# EAGLE board MRCS-IOX32 (EAGLE 7.3.0)
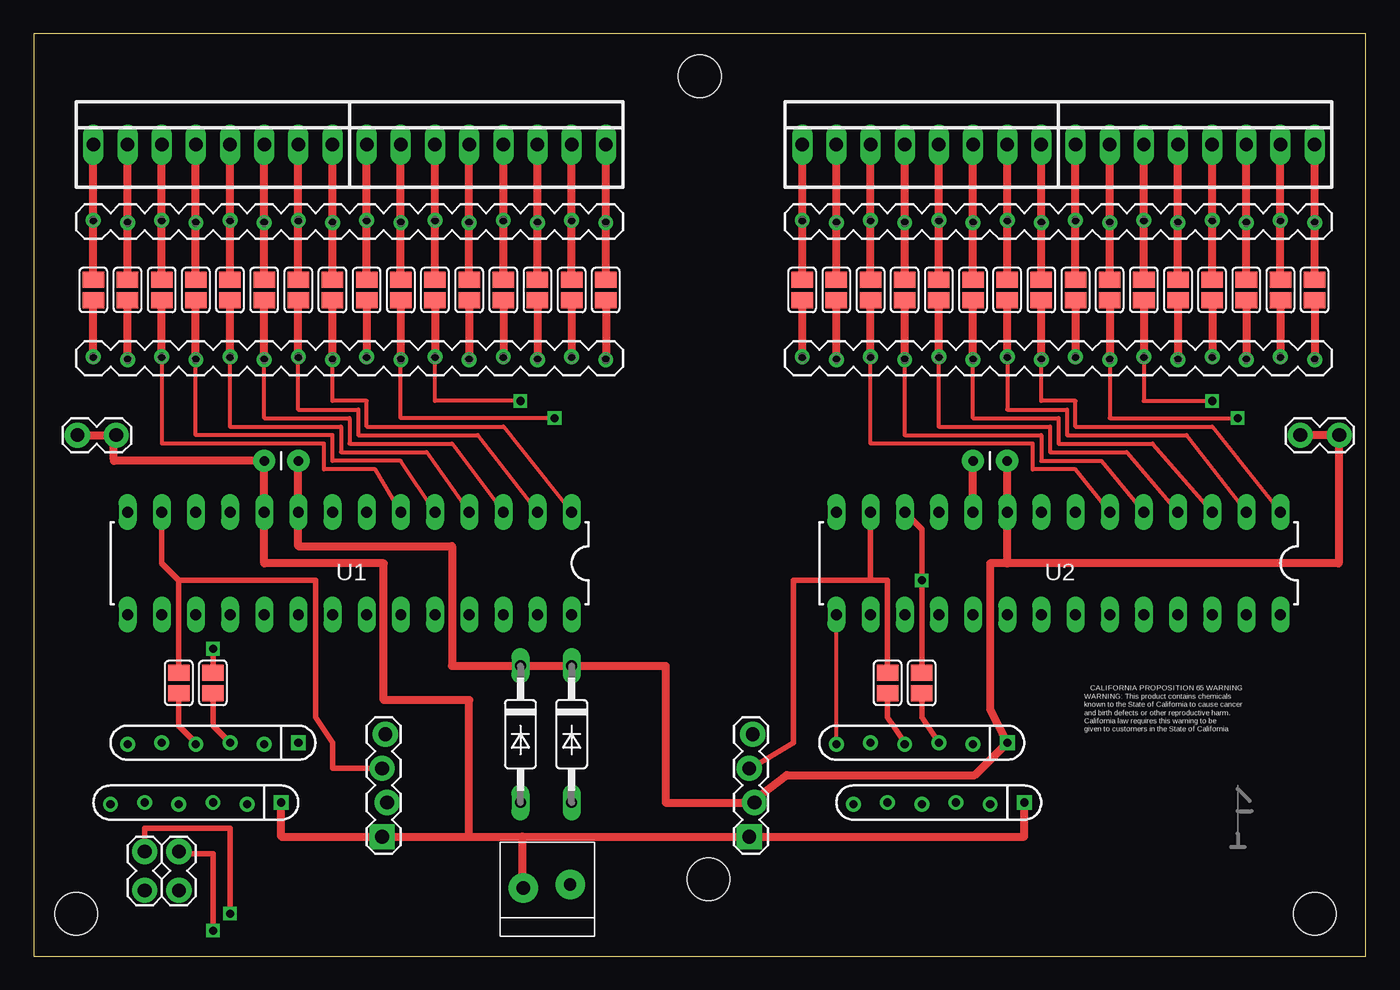
[diagram p0: board, top side]
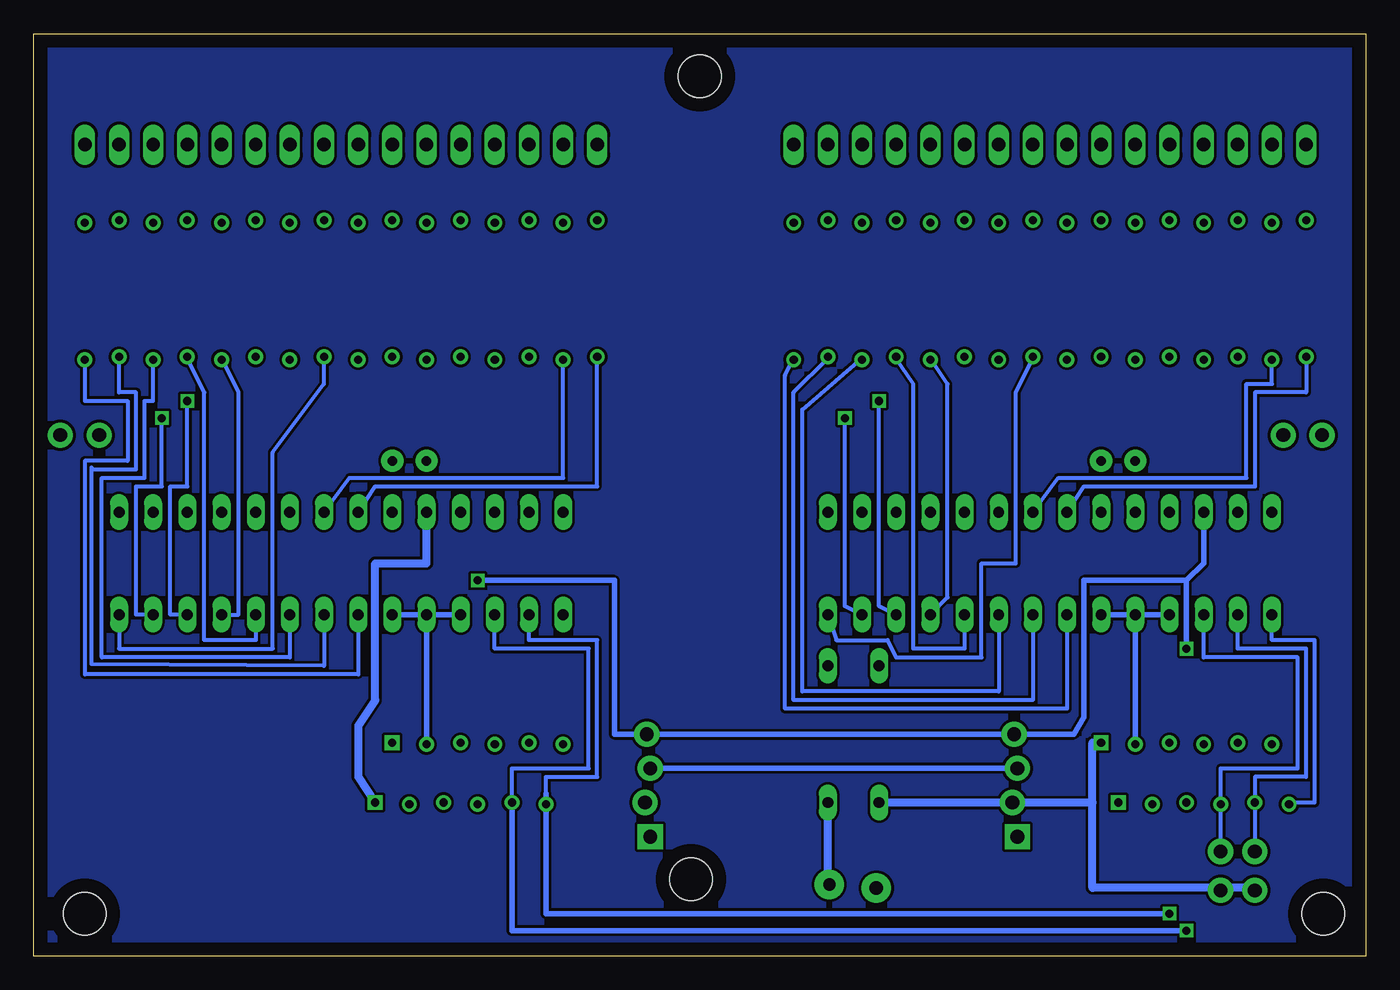
[diagram p1: board, bottom side, seen from below]

Size 99.06 x 68.58 mm. Coordinates in mm from the lower left corner, seen from the top.
Outline: 99.06,0 99.06,68.58 0,68.58 0,0 99.06,0
Copper layers (1*16): Top 0.035mm / dielectric 1.5mm / Bottom 0.035mm
Design rules "default": minimum track width 10mil, minimum drill 24mil, track to track 8mil, track to pad 8mil, pad to pad 8mil, via to via 8mil, smd to smd 8mil, copper to edge 40mil, drill to drill 8mil, minimum pad ring 10mil, minimum via ring 8mil, stop-mask expansion 4mil, vias tented up to drill 0mil, thermal gap 10mil

## Footprints (pad centres in the part's own frame; a part is rotated, then mirrored left to right if it is on the bottom)
1X02_LOCK = drill 1.016 pad 1.88: 1 -0.178,0; 2 2.718,0
CAP-PTH-SMALL = drill 0.7 pad 1.651: 1 0,0; 2 2.54,0
C2992 = drill 0.813 long: A 5.08,0; C -5.08,0
DRILL_0.1250 = hole 3.175: 0,0
1X04_LOCK = drill 1.016 pad 1.88 square: 1 0,0.127 | drill 1.016 pad 1.88: 2 2.54,-0.254; 3 5.08,0.127; 4 7.62,-0.127
1X16_MACHINE-PIN-HEADER_LOCK.004 = drill 0.6: 1 0,0.102; 2 2.54,-0.102; 3 5.08,0.102; 4 7.62,-0.102; 5 10.16,0.102; 6 12.7,-0.102; 7 15.24,0.102; 8 17.78,-0.102; 9 20.32,0.102; 10 22.86,-0.102; 11 25.4,0.102; 12 27.94,-0.102; 13 30.48,0.102; 14 33.02,-0.102; 15 35.56,0.102; 16 38.1,-0.102
3.5MMTERM = drill 0.9 pad 2.184: 1 1.8,0.254 | drill 1 pad 2.184: 2 -1.7,0
2P-SMD-2X3.3 = smd 1.168 x 1.6: 1 -0.762,0; 2 0.762,0
22-23-2081 = drill 1 long: 1 -8.89,0; 2 -6.35,0; 3 -3.81,0; 4 -1.27,0; 5 1.27,0; 6 3.81,0; 7 6.35,0; 8 8.89,0
RPACK-SIP-PTH-5 = drill 0.6 square: P$1 0,0 | drill 0.6: P$2 0.127,-2.54; P$3 0,-5.08; P$4 0.127,-7.62; P$5 0,-10.16; P$6 0.127,-12.7
DIL28-3 = drill 0.813 long: 1 -16.51,-3.81; 2 -13.97,-3.81; 3 -11.43,-3.81; 4 -8.89,-3.81; 5 -6.35,-3.81; 6 -3.81,-3.81; 7 -1.27,-3.81; 8 1.27,-3.81; 9 3.81,-3.81; 10 6.35,-3.81; 11 8.89,-3.81; 12 11.43,-3.81; 13 13.97,-3.81; 14 16.51,-3.81; 15 16.51,3.81; 16 13.97,3.81; 17 11.43,3.81; 18 8.89,3.81; 19 6.35,3.81; 20 3.81,3.81; 21 1.27,3.81; 22 -1.27,3.81; 23 -3.81,3.81; 24 -6.35,3.81; 25 -8.89,3.81; 26 -11.43,3.81; 27 -13.97,3.81; 28 -16.51,3.81

## Placement (x,y rotation side)
5V  [1X02_LOCK]  96.9,38.73 180 top
ADDR1  [1X02_LOCK]  8.26,5.08 90 top
ADDR2  [1X02_LOCK]  10.79,5.08 90 top
C1  .01uf  [CAP-PTH-SMALL]  19.68,36.83 180 top
C2  .01uf  [CAP-PTH-SMALL]  72.39,36.83 180 top
COM  [1X02_LOCK]  5.97,38.73 180 top
D1  D1  [C2992]  36.2,16.51 270 top
D2  D2  [C2992]  40.01,16.51 270 top
E$1  [DRILL_0.1250]  3.17,3.17 0 top
E$6  [DRILL_0.1250]  50.16,5.71 0 top
E$7  [DRILL_0.1250]  95.25,3.17 270 top
E$8  [DRILL_0.1250]  49.53,65.41 0 top
E$9  [MRCSLOGOTOP]  88.27,7.62 0 top
E$10  [1X04_LOCK]  26.04,8.89 90 top
E$12  [1X16_MACHINE-PIN-HEADER_LOCK.004]  57.15,54.61 0 top
E$13  [1X16_MACHINE-PIN-HEADER_LOCK.004]  4.45,44.45 0 top
E$14  [CA-PROP65WARNING]  84.45,18.41 0 top
E$15  [1X16_MACHINE-PIN-HEADER_LOCK.004]  57.15,44.45 0 top
E$19  [1X04_LOCK]  53.34,8.89 90 top
E$25  [1X16_MACHINE-PIN-HEADER_LOCK.004]  4.45,54.61 0 top
EXT5V  [3.5MMTERM]  38.1,5.08 0 top
I2CT1  [2P-SMD-2X3.3]  13.34,20.32 90 top
I2CT2  [2P-SMD-2X3.3]  10.79,20.32 90 top
I2CT3  [2P-SMD-2X3.3]  63.5,20.32 90 top
I2CT4  [2P-SMD-2X3.3]  66.04,20.32 90 top
PORTA  [22-23-2081]  13.34,60.33 0 top
PORTA1  [22-23-2081]  66.04,60.33 0 top
PORTB  [22-23-2081]  33.66,60.33 0 top
PORTB1  [22-23-2081]  86.36,60.33 0 top
RP1  [RPACK-SIP-PTH-5]  19.68,15.88 270 top
RP2  [RPACK-SIP-PTH-5]  18.41,11.43 270 top
RP3  [RPACK-SIP-PTH-5]  72.39,15.88 270 top
RP4  [RPACK-SIP-PTH-5]  73.66,11.43 270 top
SJ1  [2P-SMD-2X3.3]  22.23,49.53 90 top
SJ2  [2P-SMD-2X3.3]  19.68,49.53 90 top
SJ3  [2P-SMD-2X3.3]  17.14,49.53 90 top
SJ4  [2P-SMD-2X3.3]  14.61,49.53 90 top
SJ5  [2P-SMD-2X3.3]  12.06,49.53 90 top
SJ6  [2P-SMD-2X3.3]  9.53,49.53 90 top
SJ7  [2P-SMD-2X3.3]  6.99,49.53 90 top
SJ8  [2P-SMD-2X3.3]  4.45,49.53 90 top
SJ9  [2P-SMD-2X3.3]  42.55,49.53 90 top
SJ10  [2P-SMD-2X3.3]  40.01,49.53 90 top
SJ11  [2P-SMD-2X3.3]  37.47,49.53 90 top
SJ12  [2P-SMD-2X3.3]  34.92,49.53 90 top
SJ13  [2P-SMD-2X3.3]  32.38,49.53 90 top
SJ14  [2P-SMD-2X3.3]  29.84,49.53 90 top
SJ15  [2P-SMD-2X3.3]  27.3,49.53 90 top
SJ16  [2P-SMD-2X3.3]  24.77,49.53 90 top
SJ17  [2P-SMD-2X3.3]  57.15,49.53 90 top
SJ18  [2P-SMD-2X3.3]  72.39,49.53 90 top
SJ19  [2P-SMD-2X3.3]  69.85,49.53 90 top
SJ20  [2P-SMD-2X3.3]  67.31,49.53 90 top
SJ21  [2P-SMD-2X3.3]  64.77,49.53 90 top
SJ22  [2P-SMD-2X3.3]  62.23,49.53 90 top
SJ23  [2P-SMD-2X3.3]  59.69,49.53 90 top
SJ24  [2P-SMD-2X3.3]  74.93,49.53 90 top
SJ25  [2P-SMD-2X3.3]  95.25,49.53 90 top
SJ26  [2P-SMD-2X3.3]  92.71,49.53 90 top
SJ27  [2P-SMD-2X3.3]  90.17,49.53 90 top
SJ28  [2P-SMD-2X3.3]  87.63,49.53 90 top
SJ29  [2P-SMD-2X3.3]  85.09,49.53 90 top
SJ30  [2P-SMD-2X3.3]  82.55,49.53 90 top
SJ31  [2P-SMD-2X3.3]  80.01,49.53 90 top
SJ32  [2P-SMD-2X3.3]  77.47,49.53 90 top
U1  MCP23017  [DIL28-3]  23.5,29.21 180 top
U2  MCP23017  [DIL28-3]  76.2,29.21 180 top

## Library data of the parts
5V ADDR1 ADDR2 COM E$10 E$12 E$13 E$15 E$19 E$25 = SparkFun-Connectors
C1 C2 U1 U2 = SparkFun
D1 D2 = diode
E$1 E$6-E$8 = special-drill
E$9 = MRCSLogoTop
E$14 = MRCS-prop65warningTop
EXT5V = ModernDevice
I2CT1-I2CT4 SJ1-SJ32 = Discreter
PORTA PORTA1 PORTB PORTB1 = con-molex
RP1-RP4 = SparkFun-Passives

## Nets
GND: U1.10
S$1: PORTA.2
S$2: PORTA.1
S$3: PORTA.3
S$4: PORTB.1
S$5: PORTA.4
S$6: PORTA.5
S$7: U1.18 U1.19 U1.20
S$8: PORTA.6
S$9: PORTA.7
S$10: PORTA.8
S$11: PORTB.2
S$12: PORTB.3
S$13: PORTB.4
S$14: PORTB.5
S$15: PORTB.6
S$16: PORTB.7
S$17: PORTB.8
S$18: U1.15
S$26: U1.21
S$28: U1.8
S$29: U2.17
S$32: U1.1
S$33: U1.7
S$37: U2.8
S$39: U2.7
S$40: U2.6
S$41: U1.6
S$42: U1.5
S$43: U2.2
S$44: U1.22
S$45: U1.23
S$46: U1.4
S$47: U1.3
S$48: U1.2
S$49: U1.24
S$52: U2.24
S$55: U2.25
S$56: U2.1
S$57: PORTA1.3
S$58: PORTA1.2
S$59: PORTA1.1
S$60: PORTA1.4
S$61: PORTA1.5
S$62: PORTA1.6
S$63: PORTA1.7
S$64: PORTA1.8
S$65: PORTB1.1
S$66: PORTB1.2
S$67: PORTB1.3
S$68: PORTB1.4
S$69: PORTB1.5
S$70: PORTB1.6
S$71: PORTB1.7
S$72: PORTB1.8
S$73: U1.12 U2.12
S$74: U2.18 U2.19 U2.20
S$79: C1.1 C2.1 U1.9 U2.9
S$80: U2.15
S$83: U1.28
S$85: U1.25
S$87: U1.26
S$90: U2.5
S$92: U2.4
S$95: U2.22
S$97: U1.27
S$99: U1.16
S$100: U1.17
S$102: U2.10
S$104: U2.23
S$105: U2.21
S$108: U2.28
S$112: U2.16
S$113: U2.27
S$114: U2.26

## Tracks (layer width: path | path; a pad name or v marks a point on that pad's centre or on a via)
GND
  Top 0.61: 5.97,36.83 17.14,36.83 U1.10 17.14,29.21 26.04,29.21 26.04,19.05 32.38,19.05 32.38,8.89 | 36.32,8.89 73.66,8.89 73.66,11.43 | 36.32,8.89 36.32,5.33 | 32.38,8.89 36.32,8.89 | 18.41,11.43 18.41,8.89 32.38,8.89
S$1
  Top 0.61: 6.99,50.8 PORTA.2
S$2
  Top 0.61: 4.45,50.8 PORTA.1
S$3
  Top 0.61: 9.53,50.8 PORTA.3
S$4
  Top 0.61: 24.77,50.8 PORTB.1
S$5
  Top 0.61: 12.06,50.8 PORTA.4
S$6
  Top 0.61: 14.61,50.8 PORTA.5
S$7
  Bottom 0.406: U1.18 U1.19 | U1.20 U1.19 | U1.19 17.14,15.88
S$8
  Top 0.61: 17.14,50.8 PORTA.6
S$9
  Top 0.61: 19.68,50.8 PORTA.7
S$10
  Top 0.61: 22.23,50.8 PORTA.8
S$11
  Top 0.61: 27.3,50.8 PORTB.2
S$12
  Top 0.61: 29.84,50.8 PORTB.3
S$13
  Top 0.61: 32.38,50.8 PORTB.4
S$14
  Top 0.61: 34.92,50.8 PORTB.5
S$15
  Top 0.61: 37.47,50.8 PORTB.6
S$16
  Top 0.61: 40.01,50.8 PORTB.7
S$17
  Top 0.61: 42.55,50.8 PORTB.8
S$18
  Bottom 0.305: 5.71,11.43 3.81,11.43 3.81,23.5 6.99,23.5 U1.15
S$19
  Top 0.61: 4.45,44.45 4.45,48.26
S$20
  Bottom 0.305: 94.61,36.2 91.44,36.2 91.44,41.91 92.71,41.91 92.71,44.45
S$21
  Top 0.61: 9.53,44.45 9.53,48.26
S$22
  Top 0.61: 12.06,44.45 12.06,48.26
S$23
  Top 0.61: 77.47,48.26 77.47,44.45
S$24
  Bottom 0.61: 20.32,11.43 36.2,11.43 | 20.32,11.43 20.32,5.08 8.26,5.08 | 20.32,11.43 20.32,15.88 19.68,15.88
S$25
  Top 0.61: 6.99,44.45 6.99,48.26
S$26
  Bottom 0.305: U1.21 22.23,18.41 43.18,18.41 43.18,43.18 42.55,44.45
S$27
  Top 0.61: 14.61,44.45 14.61,48.9
S$28
  Bottom 0.305: 4.45,44.45 4.45,41.91 8.26,41.91 8.26,34.92 20.95,34.92 U1.8
S$29  (via drill 0.6)
  Top 0.406: 10.79,7.62 13.34,7.62 v13.34,1.91
  Bottom 0.305: 63.5,10.79 63.5,13.97 57.78,13.97 57.78,22.86 64.77,22.86 U2.17
  Bottom 0.406: v13.34,1.91 63.5,1.91 63.5,10.79
S$30
  pour Bottom: 0,0 99.06,0 99.06,68.58 0,68.58 0,60.96
S$31
  Top 0.61: 17.14,44.45 17.14,48.26
S$32
  Top 0.305: U1.1 34.92,39.37 24.77,39.37 24.77,41.27 22.23,41.27 22.23,44.45
S$33
  Bottom 0.305: U1.7 22.86,35.56 8.89,35.56 8.89,42.55 6.99,42.55 6.99,44.45
S$34
  Top 0.406: 13.34,19.05 13.34,17.14 14.61,15.88
S$35
  Top 0.406: 9.53,33.02 9.53,29.21 10.79,27.94 | 10.79,27.94 20.95,27.94 20.95,17.78 22.23,15.88 22.23,13.97 26.04,13.97 | 10.79,21.59 10.79,27.94
S$36
  Top 0.61: 5.97,36.96 5.97,38.73 3.3,38.73
S$37
  Bottom 0.305: U2.8 73.66,34.92 57.15,34.92 57.15,44.45
S$38  (via drill 0.6)
  Top 0.406: 8.26,7.62 8.26,9.53 14.61,9.53 v14.61,3.17
  Bottom 0.406: v14.61,3.17 60.96,3.17 60.96,12.06
S$39
  Bottom 0.305: U2.7 75.56,35.56 59.69,35.56 59.69,44.45
S$40
  Top 0.305: U2.6 77.47,36.2 74.3,36.2 74.3,38.1 62.23,38.1 62.23,44.45
S$41
  Top 0.305: U1.6 25.4,36.2 21.59,36.2 21.59,38.1 9.53,38.1 9.53,44.45
S$42
  Top 0.305: U1.5 27.3,36.83 22.23,36.83 22.23,38.73 12.06,38.73 12.06,44.45
S$43
  Top 0.305: 72.39,44.45 72.39,40.64 76.83,40.64 76.83,38.73 85.72,38.73 U2.2
S$44
  Bottom 0.305: U1.22 24.77,19.05 42.55,19.05 42.55,41.91 40.01,44.45
S$45
  Bottom 0.305: U1.23 27.3,19.68 41.91,19.68 41.91,40.64 37.47,44.45
S$46
  Top 0.305: U1.4 29.21,37.47 22.86,37.47 22.86,39.37 14.61,39.37 14.61,44.45
S$47
  Top 0.305: U1.3 31.11,38.1 23.5,38.1 23.5,40.01 17.14,40.01 17.14,44.45
S$48
  Top 0.305: U1.2 33.02,38.73 24.13,38.73 24.13,40.64 19.68,40.64 19.68,44.45
S$49
  Bottom 0.305: U1.24 29.84,22.86 33.66,22.86 33.66,42.55 34.92,44.45
S$50
  Bottom 0.61: 40.01,4.83 40.01,11.43
S$51
  Top 0.406: 10.79,19.05 10.79,17.14 12.06,15.88
S$52
  Bottom 0.305: U2.24 82.55,23.5 86.36,23.5 86.36,41.91 87.63,44.45
S$53
  Top 0.61: 80.01,48.26 80.01,44.45
S$54
  Top 0.61: 82.55,48.26 82.55,44.45 | 85.09,48.26 85.09,44.45 | 87.63,48.26 87.63,44.45 | 90.17,48.26 90.17,44.45 | 92.71,48.26 92.71,44.45
S$55
  Bottom 0.305: U2.25 83.82,25.4 83.82,41.91 85.09,44.45
S$56
  Top 0.305: U2.1 87.63,39.37 77.47,39.37 77.47,41.27 74.93,41.27 74.93,44.45
S$57
  Top 0.61: 62.23,50.8 PORTA1.3
S$58
  Top 0.61: 59.69,50.8 PORTA1.2
S$59
  Top 0.61: 57.15,50.8 PORTA1.1
S$60
  Top 0.61: 64.77,50.8 PORTA1.4
S$61
  Top 0.61: 67.31,50.8 PORTA1.5
S$62
  Top 0.61: 69.85,50.8 PORTA1.6
S$63
  Top 0.61: 72.39,50.8 PORTA1.7
S$64
  Top 0.61: 74.93,50.8 PORTA1.8
S$65
  Top 0.61: 77.47,50.8 PORTB1.1
S$66
  Top 0.61: 80.01,50.8 PORTB1.2
S$67
  Top 0.61: 82.55,50.8 PORTB1.3
S$68
  Top 0.61: 85.09,50.8 PORTB1.4
S$69
  Top 0.61: 87.63,50.8 PORTB1.5
S$70
  Top 0.61: 90.17,50.8 PORTB1.6
S$71
  Top 0.61: 92.71,50.8 PORTB1.7
S$72
  Top 0.61: 95.25,50.8 PORTB1.8
S$73  (via drill 0.6)
  Top 0.406: 66.04,21.59 v66.04,27.94 66.04,31.75 U2.12 | 13.34,21.59 v13.34,22.86
  Bottom 0.406: v66.04,27.94 55.88,27.94 55.88,16.51 21.72,16.51 20.95,17.78 20.95,27.94 13.34,27.94 | U1.12 12.06,29.21 13.34,27.94 | v13.34,22.86 13.34,27.94
S$74
  Bottom 0.406: U2.18 U2.19 | U2.20 U2.19 | U2.19 69.85,15.88
S$75
  Top 0.61: 29.84,48.26 29.84,44.45
S$76
  Top 0.61: 97.16,38.73 93.98,38.73
S$77
  Top 0.61: 95.25,48.26 95.25,44.45
S$78
  Top 0.406: 62.23,27.94 62.23,33.02 | 62.23,27.94 63.5,27.94 63.5,21.59 | 62.23,27.94 56.52,27.94 56.52,15.88 53.34,13.97
S$79
  Top 0.61: C2.1 U2.9 72.39,29.21 | 72.39,29.21 97.03,29.21 97.03,39.37 | C1.1 U1.9 19.68,30.48 31.11,30.48 31.11,21.59 46.99,21.59 46.99,11.43 53.34,11.43 56.01,13.46 69.98,13.46 72.39,15.88 71.12,18.41 71.12,29.21 72.39,29.21
S$80
  Top 0.305: 59.69,15.88 U2.15
S$81
  Bottom 0.406: 26.04,13.97 53.34,13.97
S$82
  Top 0.406: 66.04,19.05 66.04,17.78 67.31,15.88
S$83
  Bottom 0.305: U1.28 39.37,23.5 35.56,23.5 34.92,22.23 28.57,22.23 28.57,29.21 26.04,29.21 26.04,41.91 24.77,44.45
S$84
  Top 0.61: 57.15,44.45 57.15,48.26
S$85
  Bottom 0.305: U1.25 31.11,26.67 31.11,42.55 32.38,44.45
S$86
  Top 0.61: 59.69,44.45 59.69,48.26
S$87  (via drill 0.6)
  Top 0.305: v36.2,41.27 29.84,41.27 29.84,45.09
  Bottom 0.305: U1.26 36.2,26.04 v36.2,41.27
S$88
  Top 0.61: 24.77,48.26 24.77,44.45
S$89
  Top 0.61: 19.68,44.45 19.68,48.26
S$90
  Top 0.305: U2.5 79.38,36.83 74.93,36.83 74.93,38.73 64.77,38.73 64.77,44.45
S$91
  Top 0.61: 22.23,44.45 22.23,48.26
S$92
  Top 0.305: U2.4 81.28,37.47 75.56,37.47 75.56,39.37 67.31,39.37 67.31,44.45
S$93
  Top 0.61: 32.38,48.26 32.38,44.45 | 34.92,48.26 34.92,44.45 | 37.47,48.26 37.47,44.45 | 40.01,48.26 40.01,44.45 | 42.55,48.26 42.55,44.45
S$94
  Top 0.305: 87.63,33.02 83.19,38.1 76.2,38.1 76.2,40.01 69.85,40.01 69.85,44.45
S$95
  Bottom 0.305: U2.22 77.47,21.59 94.74,21.72 94.74,36.32
S$96
  Top 0.61: 72.39,44.45 72.39,48.26
S$97  (via drill 0.6)
  Top 0.305: v38.73,40.01 27.3,40.01 27.3,44.45
  Bottom 0.305: U1.27 38.73,26.04 v38.73,40.01
S$99
  Bottom 0.305: 8.26,7.62 8.26,13.34 4.45,13.34 4.45,22.86 9.53,22.86 U1.16
S$100
  Bottom 0.305: 10.79,7.62 10.79,13.97 5.08,13.97 5.08,22.23 12.06,22.23 U1.17
S$101
  Top 0.406: 63.5,19.05 63.5,17.78 64.77,15.88
S$102
  Top 0.61: U2.10 69.85,36.83
  Bottom 0.61: U2.10 69.85,29.21 73.66,29.21 73.66,19.05 74.93,17.14 74.93,13.34 73.66,11.43
S$103
  Top 0.61: 27.3,48.26 27.3,44.45
S$104
  Bottom 0.305: U2.23 80.01,22.23 93.98,22.23 93.98,35.56 90.81,35.56 90.81,41.27 90.17,41.27 90.17,44.45
S$105
  Bottom 0.305: U2.21 74.93,20.95 95.25,20.95 95.25,36.83 92.08,36.83 92.08,41.27 95.25,41.27 95.25,44.45
S$106
  Top 0.61: 69.85,44.45 69.85,48.26
S$107
  Top 0.61: 64.77,44.45 64.77,48.26
S$108
  Bottom 0.305: U2.28 92.71,22.86 81.28,22.86 81.28,37.47 77.47,42.55 77.47,44.45
S$109
  Top 0.61: 67.31,44.45 67.31,48.26
S$110
  Top 0.61: 62.23,44.45 62.23,48.26
S$111
  Top 0.61: 74.93,44.45 74.93,48.26
S$112
  Bottom 0.305: 60.96,11.43 60.96,13.34 57.15,13.34 57.15,23.5 62.23,23.5 U2.16
S$113  (via drill 0.6)
  Top 0.305: 80.01,44.45 80.01,40.01 v89.53,40.01
  Bottom 0.305: U2.27 91.44,25.4 91.44,34.92 89.53,34.92 v89.53,40.01
S$114  (via drill 0.6)
  Top 0.305: 82.55,44.45 82.55,41.27 v87.63,41.27
  Bottom 0.305: U2.26 88.9,25.4 88.9,34.92 87.63,34.92 v87.63,41.27

## Text on the board
tDocu: PORT B | LOW ADDRESS | PORT A | PORT B | HIGH ADDRESS | PORT A | DB7 | DB6 | DB5 | DB4 | DB3 | DB2 | DB1 | DB0 | DA7 | DA6 | DA5 | DA4 | DA3 | DA2 | DA1 | DA0 | DB7 | DB6 | DB5 | DB4 | DB3 | DB2 | DB1 | DB0 | DA7 | DA6 | DA5 | DA4 | DA3 | DA2 | DA1 | DA0 | 1 | I2C Term | I2C Term | SCL | SCL | 1 | 1 | SDA | SDA | 5v | 5v | Gnd | Gnd | MRCS Designs | 0804-2019 v2.3 | I2C | IOX32 | Addr | Com | 5v | A1 | A2 | cpNode I/O Extender 32